# Altium PCB PCB1.PcbDoc
Units mm, origin at the board's own origin, x right, y up, seen from the top; angles counter-clockwise.
Board outline 33.66 x 16.51 mm, 2 copper layers (Top Layer, Bottom Layer); 15 components, 10 nets, 37 pads, 4 vias.
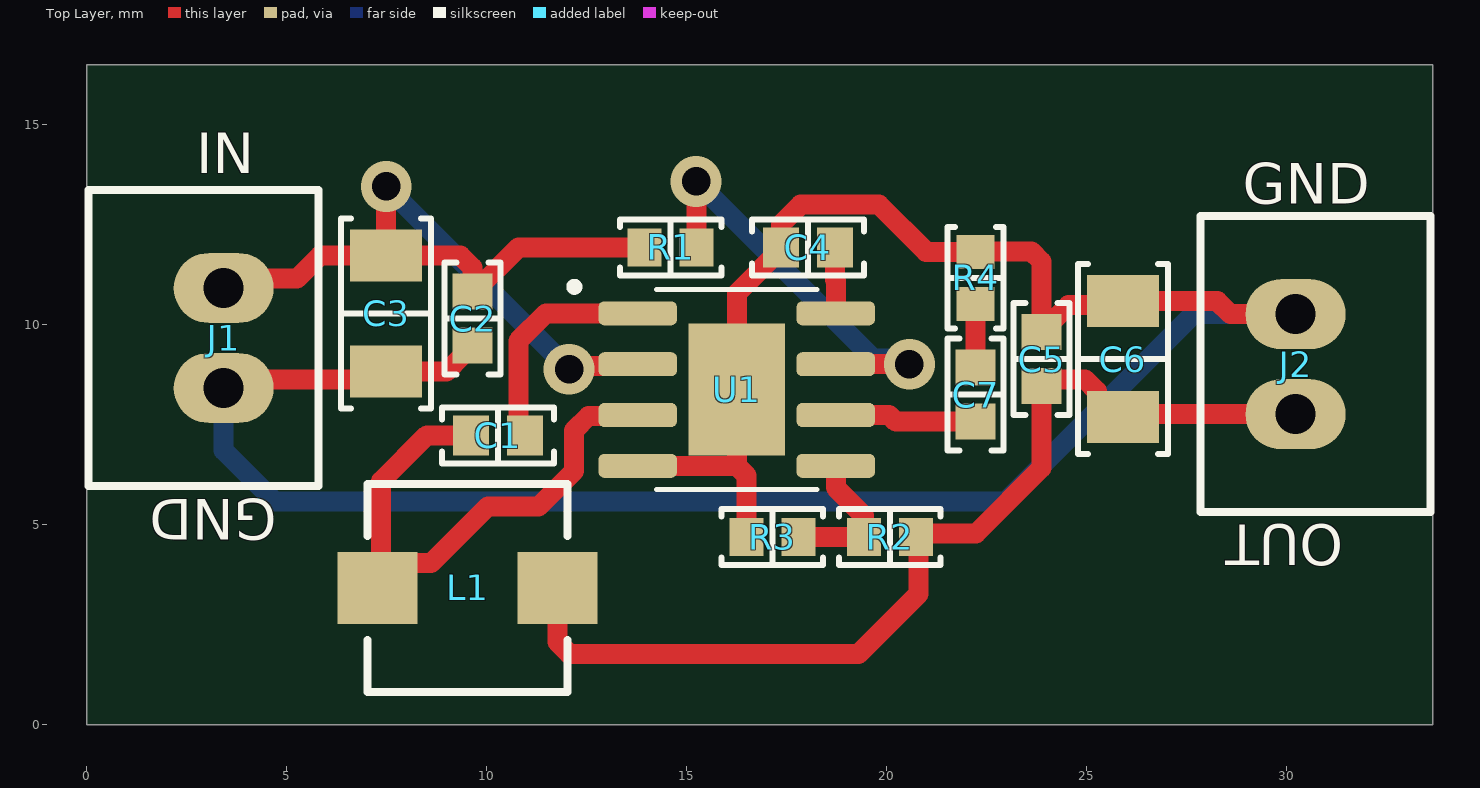
[diagram p0: Top Layer view]
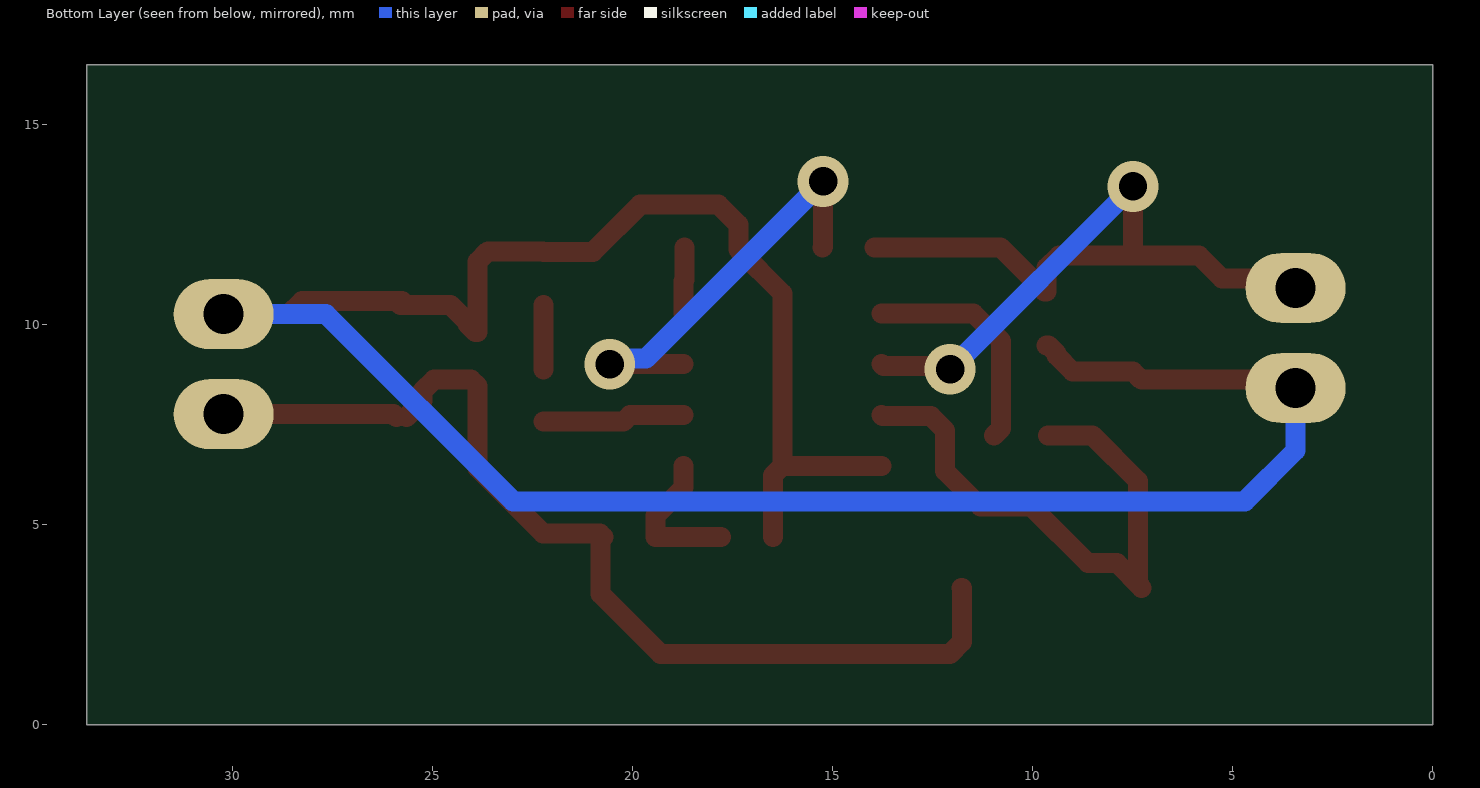
[diagram p1: Bottom Layer view, seen from below]
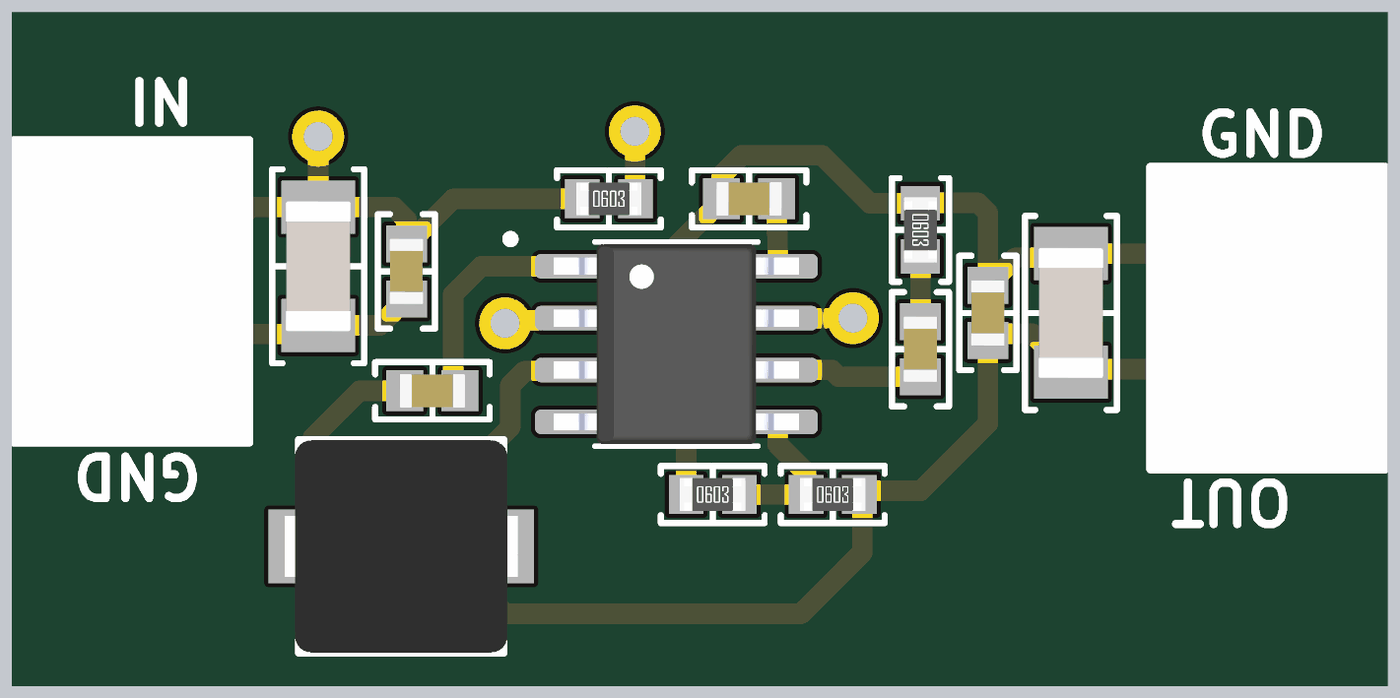
[diagram p2: 3D render of the assembled board from above, using the file's embedded part models]

## Layer stack, top to bottom
Top Solder: solder mask 0.0102, Solder Resist, Dk 3.5
Top Layer: signal copper 0.0356
Dielectric 1: dielectric 0.32, FR-4, Dk 4.8
Bottom Layer: signal copper 0.0356
Bottom Solder: solder mask 0.0102, Solder Resist, Dk 3.5

## Board outline
0,0 33.655,0 33.655,16.51 0,16.51

## Design rules (kind name [scope] priority, off if disabled: settings)
Clearance [All] p1: gap=0.3 ignorepadtopadclearanceinfootprint=TRUE
PolygonConnect [All] p1: connectstyle=Relief reliefconductorwidth=0.254 reliefentries=4 polygonreliefangle="90 Angle" airgapwidth=0.254
RoutingVias [All] p1: holewidth=0.711 width=1.27 viastyle="Through Hole" minholewidth=0.711 minwidth=1.27 maxholewidth=0.711 maxwidth=1.27
SolderMaskExpansion [All] p1: expansion=0.102 istentingtop=FALSE
Width [All] p1: maxlimit=1 minlimit=0.3 preferedwidth=0.5
30 further rules are at their usual default settings.

## Components (designator, comment, footprint, x,y, rotation, side; value= is the part's Value field where it differs from the comment)
C1 "0.1 µF" "CAP 0603_1608" 10.287,7.239 r180 top
C2 "0.1 µF" "CAP 0603_1608" 9.652,10.16 r90 top
C3 "10 µF" "CAP 1206_3216 - 0.8MM" 7.493,10.287 r90 top
C4 "0.1 µF" "CAP 0603_1608" 18.034,11.938 r0 top
C5 "0.1 µF" "CAP 0603_1608" 23.876,9.144 r90 top
C6 "10 µF" "CAP 1206_3216 - 0.8MM" 25.908,9.144 r270 top
C7 "0.1 µF" "CAP 0603_1608" 22.225,8.255 r90 top
J1 "B2B-XH-A(LF)(SN)" "JST XH B2B-XH-A" 3.429,9.672 r270 top
J2 "B2B-XH-A(LF)(SN)" "JST XH B2B-XH-A" 30.226,9.017 r90 top
L1 "10 µH" "BOURNS SRP5030T" 9.525,3.429 r0 top
R1 "100 kOhms/0603" "RES 0603_1608" 14.605,11.938 r0 top
R2 "26.1 kOhms/0603" "RES 0603_1608" 20.081,4.699 r0 top
R3 "10 kOhms/0603" "RES 0603_1608" 17.145,4.699 r0 top
R4 "6.8 kOhms/0603" "RES 0603_1608" 22.225,11.176 r270 top
U1 "MP2307DN-LF-Z" SOIC127P600X170-9N 16.256,8.382 r0 top

## Footprints (in the part's own frame and the unit in brackets; to place one, negate y for a bottom-side part, rotate by r counter-clockwise, add the part's x,y. Pads: shape width x height; smd on the part's side, far side on the other; paste and mask are expansions set on the pad)
"BOURNS SRP5030T" [mm] "Precision Wire Wound Inductor, 2-Leads, Body 5.70x5.20mm, IPC Medium Density"
  rect 2x1.8 smd: 1(-2.25,0) 2(2.25,0)
  silkscreen extent -2.5,-2.6 2.5,2.6, body extent -2.85,-2.6 2.85,2.6, height 3
"CAP 0603_1608" [mm] "Chip Capacitor, 2-Leads, Body 1.60x0.80mm, IPC Medium Density"
  rect 0.9x1 smd: 1(-0.675,0) 2(0.675,0)
  silkscreen extent -1.4,-0.7 1.4,0.7, body extent -0.8,-0.41 0.8,0.41, height 0.82
"CAP 1206_3216 - 0.8MM" [mm] "Chip Capacitor, 2-Leads, Body 3.25x1.60mm, IPC Medium Density"
  rect 1.3x1.8 smd: 1(-1.45,0) 2(1.45,0)
  silkscreen extent -2.38,-1.13 2.37,1.13, body extent -1.6,-0.8 1.6,0.8, height 0.8
"JST XH B2B-XH-A" [mm]
  oval 1.75x2.5 hole 1: 1(-1.25,0) 2(1.25,0)
  silkscreen extent -3.7,-3.38 3.7,2.38, body extent -3.7,-3.38 3.7,2.38, height 7
"RES 0603_1608" [mm] "Chip Resistor, 2-Leads, Body 1.60x0.80mm, IPC Medium Density"
  rect 0.85x0.95 smd: 1(-0.65,0) 2(0.65,0)
  silkscreen extent -1.27,-0.7 1.27,0.7, body extent -0.8,-0.4 0.8,0.4, height 0.45
SOIC127P600X170-9N [mm]
  rrect50% 1.97x0.6 smd paste+0 mask+0.102: 1(-2.475,1.905) 2(-2.475,0.635) 3(-2.475,-0.635) 4(-2.475,-1.905) 5(2.475,-1.905) 6(2.475,-0.635) 7(2.475,0.635) 8(2.475,1.905)
  rect 2.41x3.3 smd paste-3 mask+0.102: 9(0,0)
  silkscreen extent -4.16,-2.5 2,2.67, body extent -3,-2.45 3,2.45, height 1.7

## Part data
C1: library part C0603C104K5RAC7411, "CAP CER 0.1UF 50V X7R 0603", Capacitance=10nF/0603, Device Package="0603 (1608 Metric)", manufacturer=KEMET, Operating Temperature="-55°C ~ 125°C", Supplier Part Number 1=399-C0603C104K5RAC7411CT-ND, Temperature Coefficient=X7R, Tolerance=±10%, Voltage - Rated=50V, Applications="Bypass, Decoupling", componentlink1description=Datasheet, componentlink1url=https://api.kemet.com/component-edge/download/datasheet/C0603C104K5RAC7411.pdf, componentlink2description="DigiKey Link", componentlink2url=https://www.digikey.com/en/products/detail/kemet/C0603C104K5RAC7411/3317013, lastupdated="4/6/2026 7:23:52 PM", Lifecycle Status=Active, Minimum Order=1, Mounting Type="Surface Mount, MLCC", Package / Case="0603 (1608 Metric)", packaging=TapeAndReel, Part Number=C0603C104K5RAC7411, Part Status=Active, partid=2233, price=0.01, series="SMD Comm X7R", Size / Dimension="0.063\" L x 0.031\" W (1.60mm x 0.80mm)", Supplier 1=DigiKey, Thickness (Max)="0.035\" (0.90mm)"
C2: library part C0603C104K5RAC7411, "CAP CER 0.1UF 50V X7R 0603", Capacitance=22µF/0603, Device Package="0603 (1608 Metric)", manufacturer=KEMET, Operating Temperature="-55°C ~ 125°C", Supplier Part Number 1=399-C0603C104K5RAC7411CT-ND, Temperature Coefficient=X7R, Tolerance=±10%, Voltage - Rated=50V, Applications="Bypass, Decoupling", componentlink1description=Datasheet, componentlink1url=https://api.kemet.com/component-edge/download/datasheet/C0603C104K5RAC7411.pdf, componentlink2description="DigiKey Link", componentlink2url=https://www.digikey.com/en/products/detail/kemet/C0603C104K5RAC7411/3317013, lastupdated="4/6/2026 7:23:52 PM", Lifecycle Status=Active, Minimum Order=1, Mounting Type="Surface Mount, MLCC", Package / Case="0603 (1608 Metric)", packaging=TapeAndReel, Part Number=C0603C104K5RAC7411, Part Status=Active, partid=2233, price=0.01, series="SMD Comm X7R", Size / Dimension="0.063\" L x 0.031\" W (1.60mm x 0.80mm)", Supplier 1=DigiKey, Thickness (Max)="0.035\" (0.90mm)"
C3 C6: library part GRM31CR71E106KA12K, "CAP CER 10UF 25V X7R 1206", Capacitance=10µF/1206, Device Package="1206 (3216 Metric)", manufacturer="Murata Electronics", Operating Temperature="-55°C ~ 125°C", Supplier Part Number 1=490-14678-1-ND, Temperature Coefficient=X7R, Tolerance=±10%, Voltage - Rated=25V, Applications="General Purpose", componentlink1description=Datasheet, componentlink1url=https://search.murata.co.jp/Ceramy/image/img/A01X/G101/ENG/GRM31CR71E106KA12-01.pdf, componentlink2description="DigiKey Link", componentlink2url=https://www.digikey.com/en/products/detail/murata-electronics/GRM31CR71E106KA12K/4905618, lastupdated="4/6/2026 7:38:01 PM", Lifecycle Status=Active, Minimum Order=1, Mounting Type="Surface Mount, MLCC", Package / Case="1206 (3216 Metric)", packaging=TapeAndReel, Part Number=GRM31CR71E106KA12K, Part Status=Active, partid=19493, price=0.07, series=GRM, Size / Dimension="0.126\" L x 0.063\" W (3.20mm x 1.60mm)", Supplier 1=DigiKey, Thickness (Max)="0.071\" (1.80mm)"
C4: library part C0603C104K5RAC7411, "CAP CER 0.1UF 50V X7R 0603", Capacitance=100nF/0603, Device Package="0603 (1608 Metric)", manufacturer=KEMET, Operating Temperature="-55°C ~ 125°C", Supplier Part Number 1=399-C0603C104K5RAC7411CT-ND, Temperature Coefficient=X7R, Tolerance=±10%, Voltage - Rated=50V, Applications="Bypass, Decoupling", componentlink1description=Datasheet, componentlink1url=https://api.kemet.com/component-edge/download/datasheet/C0603C104K5RAC7411.pdf, componentlink2description="DigiKey Link", componentlink2url=https://www.digikey.com/en/products/detail/kemet/C0603C104K5RAC7411/3317013, lastupdated="4/6/2026 7:23:52 PM", Lifecycle Status=Active, Minimum Order=1, Mounting Type="Surface Mount, MLCC", Package / Case="0603 (1608 Metric)", packaging=TapeAndReel, Part Number=C0603C104K5RAC7411, Part Status=Active, partid=2233, price=0.01, series="SMD Comm X7R", Size / Dimension="0.063\" L x 0.031\" W (1.60mm x 0.80mm)", Supplier 1=DigiKey, Thickness (Max)="0.035\" (0.90mm)"
C5: library part C0603C104K5RAC7411, "CAP CER 0.1UF 50V X7R 0603", Capacitance=22uF/0603, Device Package="0603 (1608 Metric)", manufacturer=KEMET, Operating Temperature="-55°C ~ 125°C", Supplier Part Number 1=399-C0603C104K5RAC7411CT-ND, Temperature Coefficient=X7R, Tolerance=±10%, Voltage - Rated=50V, Applications="Bypass, Decoupling", componentlink1description=Datasheet, componentlink1url=https://api.kemet.com/component-edge/download/datasheet/C0603C104K5RAC7411.pdf, componentlink2description="DigiKey Link", componentlink2url=https://www.digikey.com/en/products/detail/kemet/C0603C104K5RAC7411/3317013, lastupdated="4/6/2026 7:23:52 PM", Lifecycle Status=Active, Minimum Order=1, Mounting Type="Surface Mount, MLCC", Package / Case="0603 (1608 Metric)", packaging=TapeAndReel, Part Number=C0603C104K5RAC7411, Part Status=Active, partid=2233, price=0.01, series="SMD Comm X7R", Size / Dimension="0.063\" L x 0.031\" W (1.60mm x 0.80mm)", Supplier 1=DigiKey, Thickness (Max)="0.035\" (0.90mm)"
C7: library part C0603C104K5RAC7411, "CAP CER 0.1UF 50V X7R 0603", Capacitance=3.9nF/0603, Device Package="0603 (1608 Metric)", manufacturer=KEMET, Operating Temperature="-55°C ~ 125°C", Supplier Part Number 1=399-C0603C104K5RAC7411CT-ND, Temperature Coefficient=X7R, Tolerance=±10%, Voltage - Rated=50V, Applications="Bypass, Decoupling", componentlink1description=Datasheet, componentlink1url=https://api.kemet.com/component-edge/download/datasheet/C0603C104K5RAC7411.pdf, componentlink2description="DigiKey Link", componentlink2url=https://www.digikey.com/en/products/detail/kemet/C0603C104K5RAC7411/3317013, lastupdated="4/6/2026 7:23:52 PM", Lifecycle Status=Active, Minimum Order=1, Mounting Type="Surface Mount, MLCC", Package / Case="0603 (1608 Metric)", packaging=TapeAndReel, Part Number=C0603C104K5RAC7411, Part Status=Active, partid=2233, price=0.01, series="SMD Comm X7R", Size / Dimension="0.063\" L x 0.031\" W (1.60mm x 0.80mm)", Supplier 1=DigiKey, Thickness (Max)="0.035\" (0.90mm)"
J1 J2: "CONN HEADER VERT 2POS 2.5MM", Current Rating (Amps)=3A, Insulation Color=Natural, manufacturer="JST Sales America Inc.", Material Flammability Rating="UL94 V-0", Operating Temperature="-25°C ~ 85°C", Supplier Part Number 1=455-2247-ND, Voltage Rating=250V, componentlink1description=Datasheet, componentlink1url=http://www.jst-mfg.com/product/pdf/eng/eXH.pdf, componentlink2description="DigiKey Link", componentlink2url=http://digikey.com/product-detail/en/jst-sales-america-inc/B2B-XH-A-LF-SN/455-2247-ND/1651045, Connector Type=Header, Contact Finish - Mating=Tin, Contact Finish - Post=Tin, Contact Length - Post="0.134\" (3.40mm)", Contact Material=Brass, Contact Shape=Square, Contact Type="Male Pin", Fastening Type="Detent Lock", Insulation Height="0.276\" (7.00mm)", Insulation Material="Polyamide (PA66), Nylon 6/6", lastupdated="1/12/2020 11:46:08 PM", Lifecycle Status=Active, Minimum Order=1, Mounting Type="Through Hole", Number of Positions=2, Number of Positions Loaded=All, Number of Rows=1, packaging=Bulk, Part Number=B2B-XH-A(LF)(SN), Part Status=Active, partid=67, Pitch - Mating="0.098\" (2.50mm)", price=0.15, series=XH, Shrouding="Shrouded - 4 Wall", Style="Board to Cable/Wire", Supplier 1=DigiKey, Termination="Press-Fit, Solder"
L1: library part SRP5030T-100M, "FIXED IND 10UH 2.75A 128MOHM SMD", Current - Saturation=3.5A, Current Rating (Amps)="2.75 A", DC Resistance (DCR)="128mOhm Max", Device Package=Nonstandard, Inductance Frequency - Test="100 kHz", manufacturer="Bourns Inc.", Operating Temperature="-40°C ~ 125°C", Supplier Part Number 1=SRP5030T-100MCT-ND, Tolerance=±20%, componentlink1description=Datasheet, componentlink1url=https://www.bourns.com/docs/Product-Datasheets/SRP5030T.pdf, componentlink2description="DigiKey Link", componentlink2url=https://www.digikey.com/en/products/detail/bourns-inc/SRP5030T-100M/3986087, Height - Seated (Max)="0.118\" (3.00mm)", Inductance="10 µH", lastupdated="4/5/2026 8:41:42 PM", Lifecycle Status=Active, Material - Core="Iron Powder", Minimum Order=1, Mounting Type="Surface Mount", Package / Case=Nonstandard, packaging=TapeAndReel, Part Number=SRP5030T-100M, Part Status=Active, partid=9, price=0.52, series=SRP5030T, Shielding=Shielded, Size / Dimension="0.224\" L x 0.205\" W (5.70mm x 5.20mm)", Supplier 1=DigiKey, Type="Drum Core, Wirewound"
R1 R2 R3 R4: library part RNCS0603BKE10K0, "RES 10K OHM 0.1% 1/16W 0603", Device Package="0603 (1608 Metric)", manufacturer="Stackpole Electronics Inc", Operating Temperature="-55°C ~ 155°C", Power (Watts)="0.063W, 1/16W", Ratings=AEC-Q200, Resistance="10 kOhms", Supplier Device Package=0603, Supplier Part Number 1=RNCS0603BKE10K0CT-ND, Temperature Coefficient=±25ppm/°C, Tolerance=±0.1%, componentlink1description=Datasheet, componentlink1url=https://www.seielect.com/catalog/sei-rncs_rnch.pdf, componentlink2description="DigiKey Link", componentlink2url=https://www.digikey.com/en/products/detail/stackpole-electronics-inc/RNCS0603BKE10K0/1708836, Composition="Thin Film", Features="Anti-Corrosive, Automotive AEC-Q200, Moisture Resistant", Height - Seated (Max)="0.022\" (0.55mm)", lastupdated="2/9/2024 8:43:37 PM", Lifecycle Status=Active, Minimum Order=1, Number of Terminations=2, Package / Case="0603 (1608 Metric)", packaging=TapeAndReel, Part Number=RNCS0603BKE10K0, Part Status=Active, partid=4838, price=0.06, series=RNCS, Size / Dimension="0.061\" L x 0.031\" W (1.55mm x 0.80mm)", Supplier 1=DigiKey
U1: "Buck Switching Regulator IC Positive Adjustable 0.925V 1 Output 3A 8-SOIC (0.154, 3.90mm Width) Exposed Pad", Package="SOIC-8 Monolithic Power", Check_prices=https://www.snapeda.com/parts/MP2307DN-LF-Z/Monolithic+Power+Systems/view-part/?ref=eda, MF="Monolithic Power", MP=MP2307DN-LF-Z, SnapEDA_Link=https://www.snapeda.com/parts/MP2307DN-LF-Z/Monolithic+Power+Systems/view-part/?ref=snap

## Via types
v1: diameter 1.27, hole 0.711, Top Layer to Bottom Layer, 4 vias

## Nets (pads, with @x,y where several pads share a name; then routed paths per layer and width w, separated by ;. In a path a pad name is that pad's centre, name@x,y a point inside that pad or via, vN(x,y) a via of type N, cw(c..) or ccw(c..) an arc to the next point about the centre after c; other vN are vias at no path point)
BS: C1.1 U1.1 | length 5.7
  Top Layer w0.5: C1.1 10.795,7.406 10.795,9.601 11.481,10.287 U1.1
COMP: C7.1 U1.6 | length 3.6
  Top Layer w0.5: U1.6 20.066,7.747 20.233,7.58 C7.1
GND: C2.1 C3.1 C4.1 C5.2 C6.1 J1.2 J2.2 R3.1 R4.1 U1.4 U1.9 | length 64
  Top Layer w0.5: J1.2 3.637,8.629 7.285,8.629 C3.1 9.004,8.837 9.402,9.235 9.402,9.285 9.602,9.485 C2.1 ; U1.4 16.256,6.477 ; R3.1 16.495,6.238 16.256,6.477 ; C6.1@25.769,10.594 28.27,10.594 28.597,10.267 J2.2 ; C6.1 25.808,10.494 24.551,10.494 24.126,10.069 24.126,10.019 23.926,9.819 C5.2 23.876,11.587 23.622,11.841 22.24,11.841 R4.1 20.991,11.826 19.812,13.005 17.854,13.005 17.359,12.509 17.359,11.888 16.256,10.785 U1.9 16.256,6.477
  Bottom Layer w0.5: J1.2 3.429,6.858 4.699,5.588 22.987,5.588 27.666,10.267 J2.2@29.845,10.267
INPUT: C2.2 C3.2 J1.1 R1.1 U1.2 | length 22
  Top Layer w0.5: J1.1 3.668,11.161 5.267,11.161 5.843,11.737 C3.2 ; v1(7.493,13.462) C3.2 ; v1(12.065,8.89) 12.142,8.967 13.731,8.967 U1.2 ; R1.1 10.805,11.938 9.702,10.835 C2.2 9.652,11.43 9.345,11.737 C3.2
  Bottom Layer w0.5: v1(7.493,13.462) v1(12.065,8.89)
NetC1_2: C1.2 L1.1 U1.3 | length 14.3
  Top Layer w0.5: C1.2 8.509,7.239 7.366,6.096 7.366,3.52 L1.1 7.892,4.046 8.618,4.046 10.033,5.461 11.303,5.461 12.192,6.35 12.192,7.366 12.548,7.722 13.756,7.722 U1.3
NetC4_2: C4.2 U1.8 | length 1.7
  Top Layer w0.5: C4.2 18.709,11.122 18.731,11.1 U1.8
NetC7_2: C7.2 R4.2 | length 1.6
  Top Layer w0.5: C7.2@22.225,8.884 R4.2@22.225,10.495
NetR1_2: R1.2 U1.7 | length 10.7
  Top Layer w0.5: v1(15.24,13.589) 15.247,13.582 15.247,11.945 R1.2 ; U1.7 v1(20.574,9.017)
  Bottom Layer w0.5: v1(15.24,13.589) 19.665,9.164 20.427,9.164 v1(20.574,9.017)
NetR2_1: R2.1 R3.2 U1.5 | length 3.7
  Top Layer w0.5: R3.2 R2.1 19.431,5.232 18.731,5.932 U1.5
OUTPUT: C5.1 C6.2 J2.1 L1.2 R2.2 | length 25.2
  Top Layer w0.5: L1.2 11.771,3.425 11.771,2.072 12.065,1.778 19.304,1.778 20.804,3.278 20.804,4.626 R2.2 20.82,4.788 22.238,4.788 23.876,6.426 C5.1 24.043,8.636 24.965,8.636 25.258,8.343 25.258,8.094 C6.2@25.658,7.694 ; C6.2 25.981,7.767 J2.1

## Silkscreen, mask and mechanical layers (free items; w line width, h text height)
Top Overlay:
  text "IN" at 2.743,13.792 h1.02
  text "GND" at 28.905,13.03 h1.02
  text "GND" at 4.75,5.639 h1.02 r180
  text "OUT" at 31.42,5.004 h1.02 r180